# EAGLE board Cree_XP-E_Turn (EAGLE 6.4)
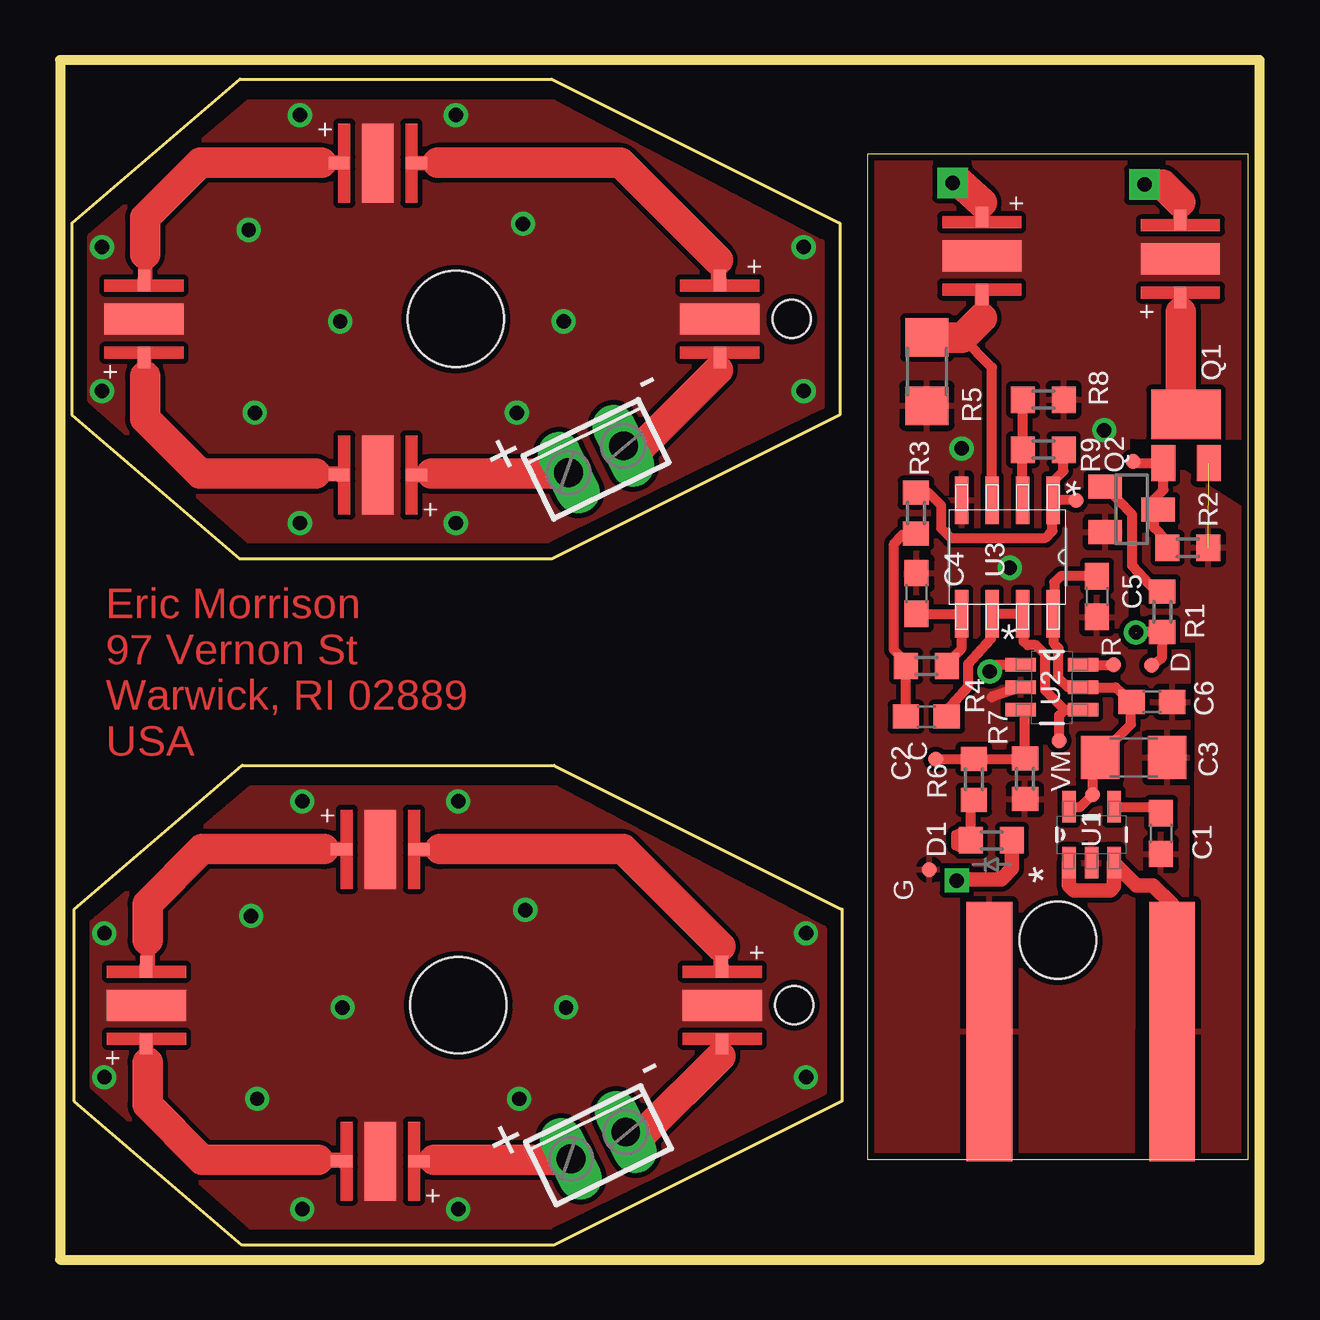
[diagram p0: board, top side]
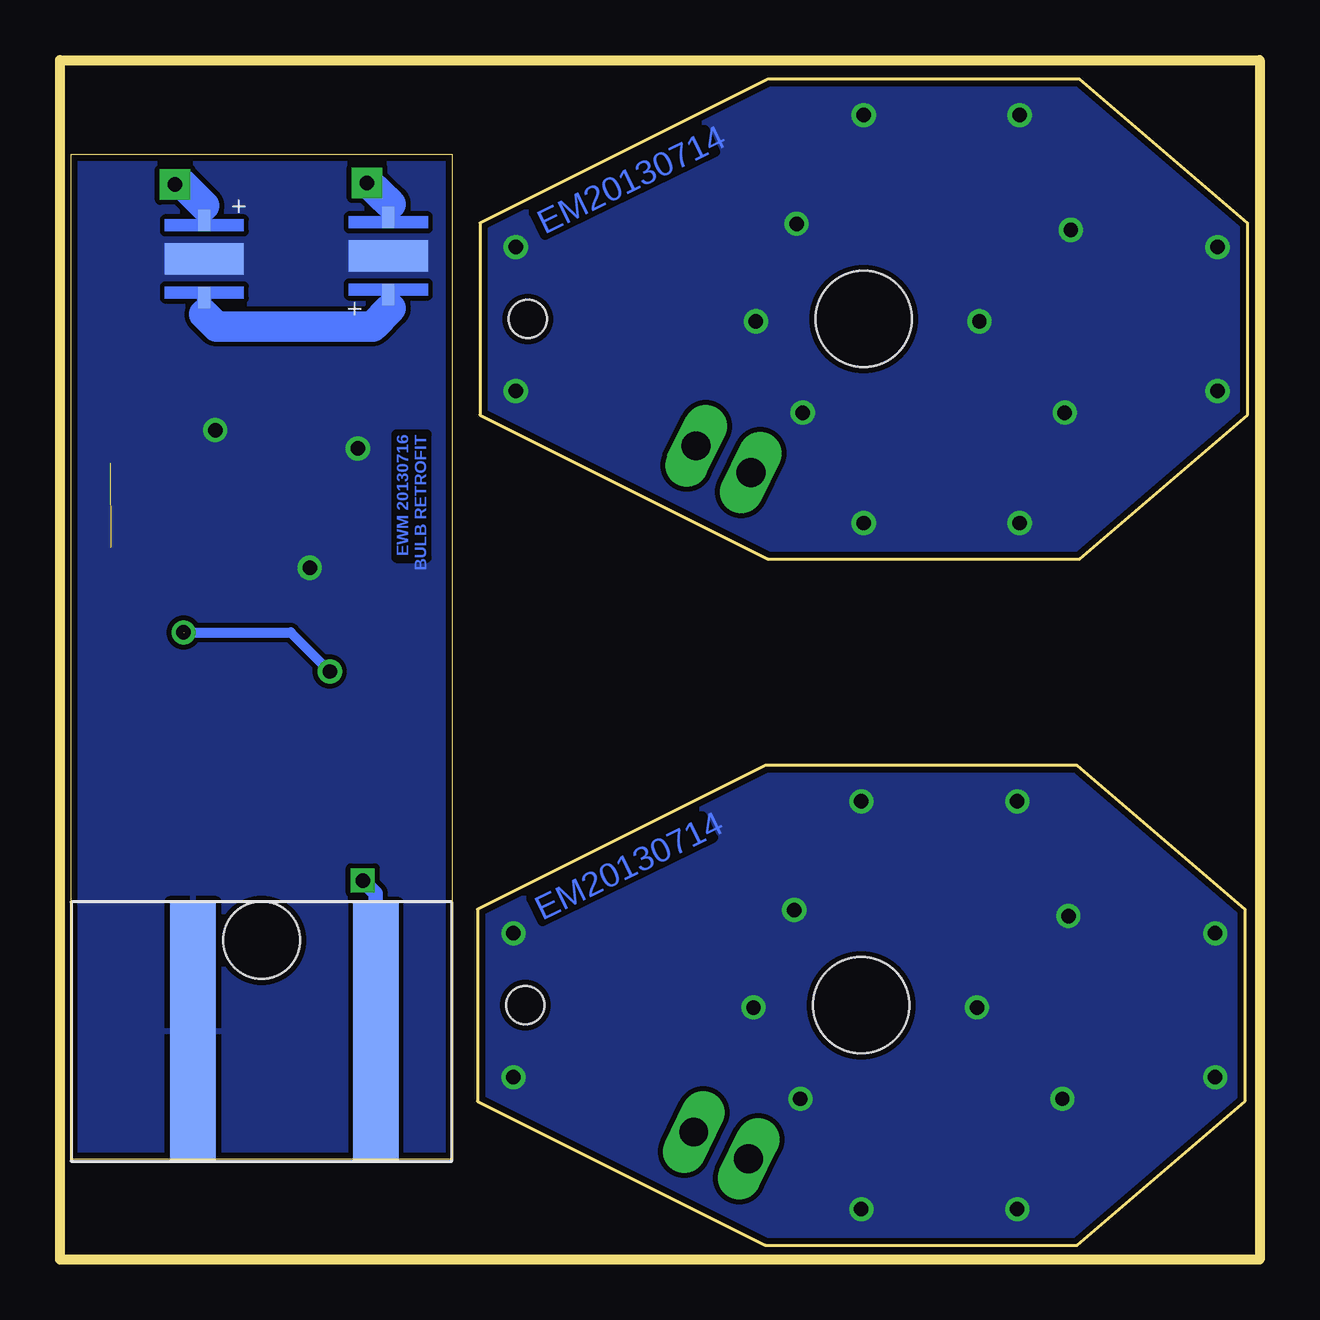
[diagram p1: board, bottom side, seen from below]

Size 50 x 50 mm. Coordinates in mm from the lower left corner, seen from the top.
Outline: 7.6,0.6 0.6,6.6 0.6,14.6 7.6,20.6 20.6,20.6 32.6,14.6 32.6,6.6 20.6,0.6 7.6,0.6
Outline: 0,0 50,0 50,50 0,50 0,0
Outline: 7.5,29.2 0.5,35.2 0.5,43.2 7.5,49.2 20.5,49.2 32.5,43.2 32.5,35.2 20.5,29.2 7.5,29.2
Outline: 49.52,4.17 49.52,46.08 33.65,46.08 33.65,4.17 49.52,4.17
Copper layers (1*16): Top 0.035mm / dielectric 1.5mm / Bottom 0.035mm
Design rules "default *": minimum track width 10mil, minimum drill 24mil, track to track 8mil, track to pad 8mil, pad to pad 8mil, via to via 8mil, smd to smd 8mil, copper to edge 10mil, drill to drill 10mil, minimum pad ring 10mil, minimum via ring 8mil, stop-mask expansion 4mil, vias tented up to drill 0mil, thermal gap 10mil
Holes 4 mm at 16.6,10.6 16.5,39.2
Holes 1.59 mm at 30.6,10.6 30.5,39.2

## Footprints (pad centres in the part's own frame; a part is rotated, then mirrored left to right if it is on the bottom)
TPI_PAD = smd 0.635 x 0.635: P$1 0,0
C0603 = smd 1.1 x 1: 1 -0.85,0; 2 0.85,0
C1206 = smd 1.6 x 1.8: 1 -1.4,0; 2 1.4,0
D0603 = smd 1 x 1.1: 1A -0.85,0; 2C 0.85,0
CREE_XP-E = smd 0.9 x 0.5: AN -1.6,0; CT 1.6,0 | smd 1.3 x 3.3: TH 0,0
SOT-23_POWER = smd 1 x 1.5: P$1 -0.95,-2.025; P$2 0.95,-2.025 | smd 2.9 x 2.05: P$3 0,0
SOT23 = smd 1 x 1.4: 1 -0.95,-1.1; 2 0.95,-1.1; 3 0,1.1
R0603 = smd 1 x 1.1: 1 -0.85,0; 2 0.85,0
R1206 = smd 1.6 x 1.803: 1 -1.422,0; 2 1.422,0
SOT95P280X145-5N = smd 1.321 x 0.559: 1 -1.168,0.94; 2 -1.168,0; 3 -1.168,-0.94; 4 1.168,-0.94; 5 1.168,0.94
SOT95P280X145-6N = smd 1.27 x 0.559: 1 -1.295,0.94; 2 -1.295,0; 3 -1.295,-0.94; 4 1.295,-0.94; 5 1.295,0; 6 1.295,0.94
SOIC8-N_MC = smd 1.981 x 0.559: 1 -2.362,1.905; 2 -2.362,0.635; 3 -2.362,-0.635; 4 -2.362,-1.905; 5 2.362,-1.905; 6 2.362,-0.635; 7 2.362,0.635; 8 2.362,1.905
TAILLIGHT = smd 1.905 x 10.795 bottom: H1 -4.763,0; L2 2.857,0 | smd 1.905 x 10.795: H2 4.763,0; L1 -2.857,0 | hole 3.2: 0,3.81
2POL254 = drill 1.2 long: 1 -1.27,0; 2 1.27,0

## Placement (x,y rotation side)
+5V  TPI  [TPI_PAD]  43.05,19.38 90 top
C1  10n  [C0603]  45.89,17.76 270 top
C2  .1u  [C0603]  36.11,22.63 180 top
C3  47u  [C1206]  44.75,20.93 0 top
C4  .1u  [C0603]  35.7,27.76 90 top
C5  .1u  [C0603]  43.22,27.64 270 top
C6  .1u  [C0603]  45.51,23.24 0 top
D1  DIODE_0603  [D0603]  38.83,17.48 180 top
DRILEGEND  [DRILEGEND]  -0.2,-4.01 0 top  (outside the outline)
GND  TPI  [TPI_PAD]  36.24,16.26 90 top
LED1  LUXEON_REBELCREE_XP-E  [CREE_XP-E]  27.6,10.6 270 top
LED2  LUXEON_REBELCREE_XP-E  [CREE_XP-E]  13.35,17.1 0 top
LED3  LUXEON_REBELCREE_XP-E  [CREE_XP-E]  3.6,10.6 90 top
LED4  LUXEON_REBELCREE_XP-E  [CREE_XP-E]  13.35,4.1 180 top
LED5  LUXEON_REBELCREE_XP-E  [CREE_XP-E]  27.5,39.2 270 top
LED6  LUXEON_REBELCREE_XP-E  [CREE_XP-E]  13.25,45.7 0 top
LED7  LUXEON_REBELCREE_XP-E  [CREE_XP-E]  3.5,39.2 90 top
LED8  LUXEON_REBELCREE_XP-E  [CREE_XP-E]  13.25,32.7 180 top
LED9  LUXEON_REBELCREE_XP-E  [CREE_XP-E]  46.7,41.71 90 top
LED10  LUXEON_REBELCREE_XP-E  [CREE_XP-E]  43.98,41.71 270 bottom
LED11  LUXEON_REBELCREE_XP-E  [CREE_XP-E]  36.31,41.84 90 bottom
LED12  LUXEON_REBELCREE_XP-E  [CREE_XP-E]  38.42,41.84 270 top
MEASURE  TPI  [TPI_PAD]  41.65,21.62 90 top
OUTA  TPI  [TPI_PAD]  42.36,31.65 90 top
PWM  TPI  [TPI_PAD]  44.72,33.28 90 top
Q1  SI2301CDS  [SOT-23_POWER]  46.93,35.23 0 top
Q2  BC846  [SOT23]  44.67,31.27 270 top
R1  10k  [R0603]  45.94,27 90 top
R2  1k  [R0603]  47.01,29.67 180 top
R3  3.9k  [R0603]  35.68,31.12 270 top
R4  3.9k  [R0603]  36.11,24.74 0 top
R5  .1  [R1206]  36.14,37.01 90 top
R6  3.3k  [R0603]  38.09,20.02 270 top
R7  1k  [R0603]  40.23,20.04 270 top
R8  1k  [R0603]  40.99,35.84 0 top
R9  28.7K  [R0603]  40.99,33.76 180 top
RESET  TPI  [TPI_PAD]  43.91,24.79 90 top
TPICLK  TPI  [TPI_PAD]  36.49,20.85 90 top
TPIDATA  TPI  [TPI_PAD]  45.51,24.77 90 top
U1  SPX5205M5-L-3-3  [SOT95P280X145-5N]  42.99,17.7 90 top
U2  ATTINY5-TSHR  [SOT95P280X145-6N]  41.34,23.85 0 top
U3  MCP6L2-X_SN  [SOIC8-N_MC]  39.49,29.29 270 top
U$1  CON_TAILLIGHT  [TAILLIGHT]  41.6,9.5 0 bottom
X1  [2POL254]  22.44,4.76 26 top
X2  [2POL254]  22.34,33.36 26 top

## Library data of the parts
+5V GND MEASURE OUTA PWM RESET TPICLK TPIDATA = Personal
C1 = resistor; DIGIKEY: 445-1311-1-ND; DIGIKEY_COST: .10
C2 C4-C6 = resistor; DIGIKEY: 445-1316-1-ND; DIGIKEY_COST: .10
C3 = resistor; DIGIKEY: 399-5508-1-ND; DIGIKEY_COST: .67
D1 = Combined; DIGIKEY: 641-1002-1-ND; DIGIKEY_COST: .23
DRILEGEND = drilegend
LED1-LED12 U$1 = Combined
Q1 = Combined; DIGIKEY: 568-6956-1-ND; DIGIKEY_COST: .69; NEWARK: 16P3701; NEWARK_COST: .37
Q2 = transistor-neu-to92; DIGIKEY: BC846BMTFCT-ND; DIGIKEY_COST: .17; NEWARK: 75R0728; NEWARK_COST: .14
R1 = resistor; DIGIKEY: RMCF0603FT10K0CT-ND; DIGIKEY_COST: .04
R2 R7 R8 = resistor; DIGIKEY: RMCF0603FT1K00CT-ND; DIGIKEY_COST: .04
R3 R4 = resistor; DIGIKEY: RMCF0603FT3K90CT-ND; DIGIKEY_COST: .04
R5 = resistor; DIGIKEY: A103268CT-ND; DIGIKEY_COST: .13
R6 = resistor; DIGIKEY: RMCF0603FT3K30CT-ND; DIGIKEY_COST: .04
R9 = resistor; DIGIKEY: RMCF0603FT28R7CT-ND; DIGIKEY_COST: .04
U1 = Exar_By_element14_Batch_1; DIGIKEY: 1016-1251-ND; DIGIKEY_COST: .60; MPN: SPX5205M5-L-3-3; OC_FARNELL: 1831954; OC_NEWARK: 23R9851; PACKAGE: SOT-23-5; SUPPLIER: EXAR
U2 = Atmel_By_element14_Batch_1; DESCRIPTION: Microcontroller; DIGIKEY: ATTINY10-TSHRCT-ND; DIGIKEY_COST: .69; MPN: ATTINY5-TSHR; OC_FARNELL: 1841626; OC_NEWARK: 12T1342; PACKAGE: SOT563-6; SUPPLIER: ATMEL
U3 = Combined; DIGIKEY: MCP6L2T-E/SNCT-ND; DIGIKEY_COST: .64
X1 X2 = con-phoenix-254; OC_FARNELL: unknown; OC_NEWARK: unknown

## Nets
+14V: Q1.P$2 R2.1 U1.1 U1.3 U$1.H1
BLINK: R6.1 R7.1 TPICLK.P$1 U2.3
CROSSOVER: LED10.CT LED11.AN
D-: LED12.CT R5.2 U3.3
GND: C1.2 C3.2 C4.2 C5.2 C6.2 GND.P$1 LED9.TH LED10.TH LED11.TH LED12.TH Q2.2 R5.1 R7.2 R8.2 U1.2 U2.2 U3.4 U$1.L1 U$1.L2
INA-: R8.1 R9.2 U3.2
INB+: C4.1 R4.2 U3.5
MEASURE: C2.1 MEASURE.P$1 U2.4 U3.6 U3.7
MOSFET: R1.1 TPIDATA.P$1 U2.1
N$1: LED5.AN LED6.CT
N$2: LED1.AN LED2.CT
N$3: LED2.AN LED3.CT
N$4: LED3.AN LED4.CT
N$5: LED6.AN LED7.CT
N$6: LED7.AN LED8.CT
N$7: C1.1 U1.4
N$8: PWM.P$1 Q1.P$1 Q2.3 R2.2
N$9: Q2.1 R1.2
N$10: C2.2 R3.2 R4.1
N$11: D1.1A U$1.H2
N$12: D1.2C R6.2
N$13: LED11.CT LED12.AN
N$14: LED9.AN Q1.P$3
N$15: LED9.CT LED10.AN
OUTA: OUTA.P$1 R3.1 R9.1 U3.1
RESET: RESET.P$1 U2.6
THERMAL: LED1.TH LED2.TH LED3.TH LED4.TH
THERMAL1: LED5.TH LED6.TH LED7.TH LED8.TH
V+: LED4.AN X1.1
V+1: LED8.AN X2.1
V-: LED1.CT X1.2
V-1: LED5.CT X2.2
VCC: +5V.P$1 C3.1 C5.1 C6.1 U1.5 U2.5 U3.8

## Tracks (layer width: path | path; a pad name or v marks a point on that pad's centre or on a via)
+14V  (1 unrouted)
  Top 0.61: U$1.H1 46.36,14.8 45.56,15.6 44.87,15.6 U1.3 43.93,15.55 43.78,15.39 42.26,15.39 42.05,15.6 U1.1
  pour Top: 45.81,4.07 45.97,14.89 47.39,14.86 47.44,25.83 45.18,25.83 45.15,28.02 45.23,30.33 45.18,33.86 49.5,31.14 49.62,4.04
BLINK
  Top 0.406: 40.23,22.94 U2.3 40.23,22.91 R7.1 40.2,20.87 R6.1 36.49,20.87 TPICLK.P$1
CROSSOVER
  Bottom 0.61: LED11.AN 36.21,39.65 | 43.98,39.4 LED10.CT
  Bottom 1.27: 36.21,39.65 36.97,38.89 43.48,38.89 43.98,39.4
D-
  Top 0.406: U3.3 38.85,37.19 37.58,38.46 36.16,38.46 R5.2
  Top 0.61: LED12.CT 38.42,39.24
  Top 1.27: 38.42,39.24 37.61,38.43 R5.2
GND  (via drill 0.6)
  Top 0.406: U2.2 38.83,23.45
  other vias: 39.59,28.83 37.58,33.81 43.53,34.57
  pour Top: 33.67,4.17 33.62,46.08 40.78,46.1 43.91,46.15 45,46.13 49.5,46.08 49.52,34.29 45.18,34.29 44.47,34.32 44.47,32.56 44.39,25.32 47.01,25.32 46.93,15.04 44.7,15.04 44.67,4.17
  pour Bottom: 33.18,3.39 33.33,46.54 50.1,46.48 50.05,3.44
INA-
  Top 0.406: U3.2 40.12,33.74 R9.2 R8.1
INB+
  Top 0.406: 37.55,26.89 U3.5 | C4.1 37.57,26.91 U3.5 | R4.2 36.96,24.85 37.58,25.48 U3.5
MEASURE
  Top 0.406: U2.4 41.88,22.91 | 41.88,22.91 41.06,23.73 41.06,25.22 40.68,25.6 40.33,25.6 40.17,25.76 40.17,26.87 U3.7 U3.6 38.8,26.87 38.8,25.88 37.86,24.84 37.86,23.9 36.96,22.9 C2.1 | MEASURE.P$1 41.65,22.68 41.88,22.91
MOSFET  (via drill 0.6)  (1 unrouted)
  Top 0.406: TPIDATA.P$1 45.93,25.06 R1.1 44.89,26.15 44.85,26.11 | U2.1 39.03,24.79 v38.75,24.51
  Bottom 0.406: v44.85,26.14 40.38,26.14 v38.75,24.51
N$1
  Top 0.61: LED5.AN 27.42,40.88 27.42,41.65 | 15.74,45.71 15.73,45.7 LED6.CT
  Top 1.27: 27.42,41.65 23.36,45.71 15.74,45.71
N$2
  Top 0.61: LED1.AN 27.52,12.28 27.52,13.05 | 15.84,17.11 15.83,17.1 LED2.CT
  Top 1.27: 27.52,13.05 23.46,17.11 15.84,17.11
N$3
  Top 0.61: LED2.AN 11.01,17.11 | 3.65,13.3 3.65,12.25 LED3.CT
  Top 1.27: 11.01,17.11 5.93,17.11 3.65,14.82 3.65,13.3
N$4
  Top 0.61: LED3.AN 3.6,8.27 3.65,8.22 | 10.76,4.16 11.69,4.16 LED4.CT
  Top 1.27: 3.65,8.22 3.65,6.44 5.93,4.16 10.76,4.16
N$5
  Top 0.61: LED6.AN 10.91,45.71 | 3.55,41.9 3.55,40.85 LED7.CT
  Top 1.27: 10.91,45.71 5.83,45.71 3.55,43.42 3.55,41.9
N$6
  Top 0.61: LED7.AN 3.5,36.87 3.55,36.82 | 10.66,32.76 11.59,32.76 LED8.CT
  Top 1.27: 3.55,36.82 3.55,35.04 5.83,32.76 10.66,32.76
N$7
  Top 0.406: 46.18,18.75 C1.1 45.62,18.87 U1.4
N$8
  Top 0.406: R2.2 46.18,29.93 45.61,30.51 45.61,31.11 Q2.3 45.62,31.71 45.99,32.08 45.99,33.2 Q1.P$1 44.72,33.21 PWM.P$1
N$9
  Top 0.406: R1.2 45.67,27.85 44.7,28.91 44.7,31.04 Q2.1
N$10
  Top 0.406: C2.2 R4.1 35.26,24.93 34.77,25.4 34.77,29.85 35.09,30.2 35.62,30.2 R3.2
N$11  (via drill 0.6 pad 0.41)
  Top 0.61: D1.1A 39.68,16.29 39.23,15.85 37.43,15.85 v37.38,15.8
  Bottom 0.61: U$1.H2 36.84,15.25 v37.38,15.8
N$12
  Top 0.406: D1.2C 37.98,19.05 R6.2
N$13  (via drill 0.6 pad 1.27)
  Top 0.61: LED12.AN 38.42,44.05
  Top 1.27: 38.42,44.05 37.53,44.86 v37.2,44.88
  Bottom 0.61: LED11.CT 36.21,43.99
  Bottom 1.27: 36.21,43.99 37.15,44.88 v37.2,44.88
N$14
  Top 0.61: LED9.AN 46.7,39.52 46.73,39.5
  Top 1.27: 46.73,39.5 46.73,35.43 Q1.P$3
N$15  (via drill 0.6 pad 1.27)
  Top 0.61: LED9.CT 46.7,44.07
  Top 1.27: 46.7,44.07 45.97,44.81 v45.2,44.81
  Bottom 0.61: LED10.AN 43.98,43.92
  Bottom 1.27: 43.98,43.92 44.87,44.81 v45.2,44.81
OUTA
  Top 0.406: R3.1 36.2,31.97 36.72,31.45 36.72,30.48 37.13,30.07 41.06,30.07 41.37,30.38 41.37,31.62 U3.1 | U3.1 41.39,32.44 41.83,32.87 41.83,33.75 R9.1 | OUTA.P$1 U3.1
RESET
  Top 0.406: U2.6 RESET.P$1
THERMAL  (via drill 0.6)
  other vias: 7.97,14.32 19.4,14.57 11.78,10.51 8.22,6.7 21.09,10.51 19.14,6.7 31.1,13.6 31.1,7.6 10.1,19.1 16.6,19.1 16.6,2.1 10.1,2.1 1.85,7.6 1.85,13.6
  pour Top: 1.36,7.2 1.36,14.06 7.97,19.65 20.67,19.65 31.84,13.81 31.84,6.95 20.41,1.36 7.97,1.36
  pour Bottom: 0.35,6.44 0.35,14.82 7.2,20.92 20.92,20.92 32.86,14.82 32.86,6.19 20.92,0.35 7.2,0.35
THERMAL1  (via drill 0.6)
  other vias: 7.87,42.92 19.3,43.17 11.68,39.11 8.12,35.3 20.99,39.11 19.04,35.3 31,42.2 31,36.2 10,47.7 16.5,47.7 16.5,30.7 10,30.7 1.75,36.2 1.75,42.2
  pour Top: 1.26,35.8 1.26,42.66 7.87,48.25 20.57,48.25 31.74,42.41 31.74,35.55 20.31,29.96 7.87,29.96
  pour Bottom: 0.25,35.04 0.25,43.42 7.1,49.52 20.82,49.52 32.76,43.42 32.76,34.79 20.82,28.95 7.1,28.95
V+
  Top 0.61: LED4.AN 15.53,4.1 15.59,4.16
  Top 1.27: 15.59,4.16 21.25,4.16 X1.1
V+1
  Top 0.61: LED8.AN 15.43,32.7 15.49,32.76
  Top 1.27: 15.49,32.76 21.16,32.76 X2.1
V-
  Top 0.61: LED1.CT 27.52,8.92 27.52,8.47
  Top 1.27: 27.52,8.47 24.36,5.32 X1.2
V-1
  Top 0.61: LED5.CT 27.42,37.52 27.42,37.07
  Top 1.27: 27.42,37.07 24.27,33.91 X2.2
VCC
  Top 0.406: C5.1 41.71,28.49 41.45,28.22 41.45,26.98 U3.8 41.42,26.9 41.42,25.71 41.62,25.48 41.62,24.23 42.03,23.85 U2.5 44,23.85 C6.1 44.65,23.23 44.65,22.3 43.35,21 C3.1 43.05,20.63 +5V.P$1 42.54,18.87 U1.5

## Text on the board
Top: Eric Morrison / 97 Vernon St / Warwick, RI 02889 / USA
Bottom: EM20130714 | EWM 20130716 / BULB RETROFIT | EM20130714
tPlace: - | + | - | +
tNames: R | D | C | M | V | G
_tNames: Q1 | R5 | R8 | R3 | R9 | Q2 | R2 | C4 | U3 | C5 | R1 | R4 | U2 | C6 | C2 | R7 | C3 | R6 | D1 | C1 | U1